# Altium PCB DSD_SDR_MainBoard_Simple.PcbDoc
Units mm, origin at the board's own origin, x right, y up, seen from the top; angles counter-clockwise.
Board outline 80.64 x 31.5 mm, 2 copper layers (Top Layer, Bottom Layer), stack 1.569 mm thick; 10 components, 13 nets, 66 pads, 11 vias.
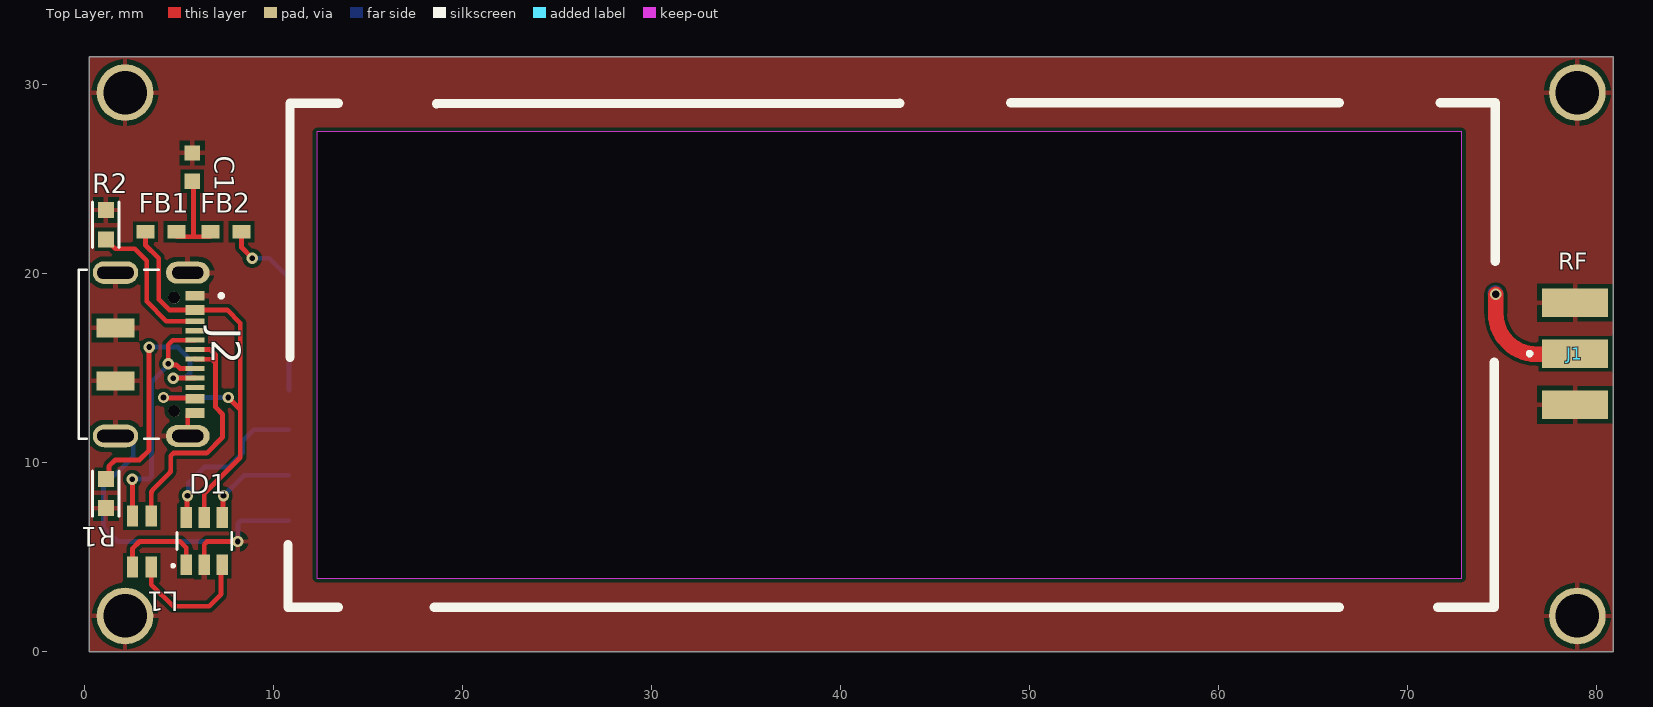
[diagram p0: Top Layer view]
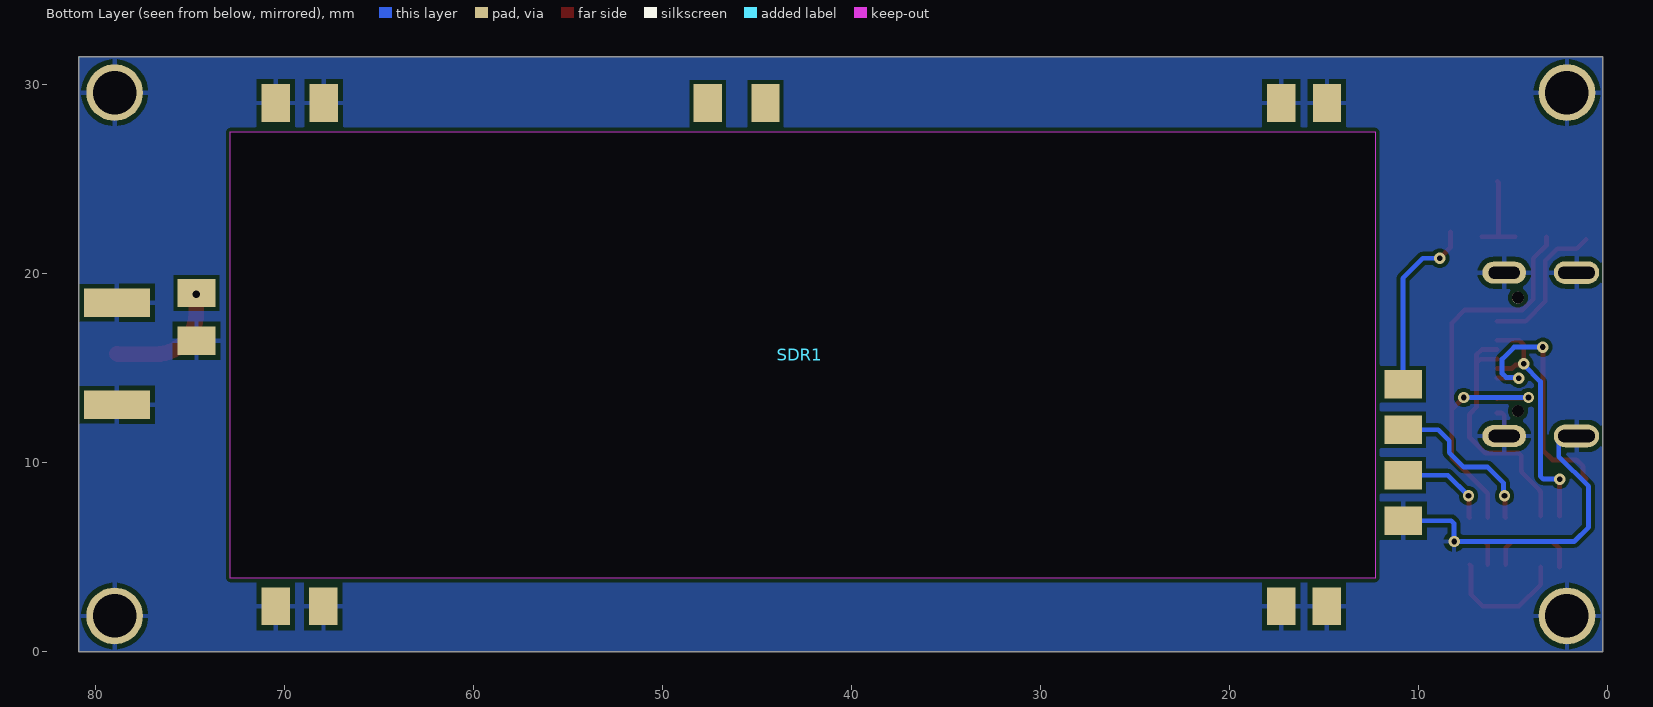
[diagram p1: Bottom Layer view, seen from below]
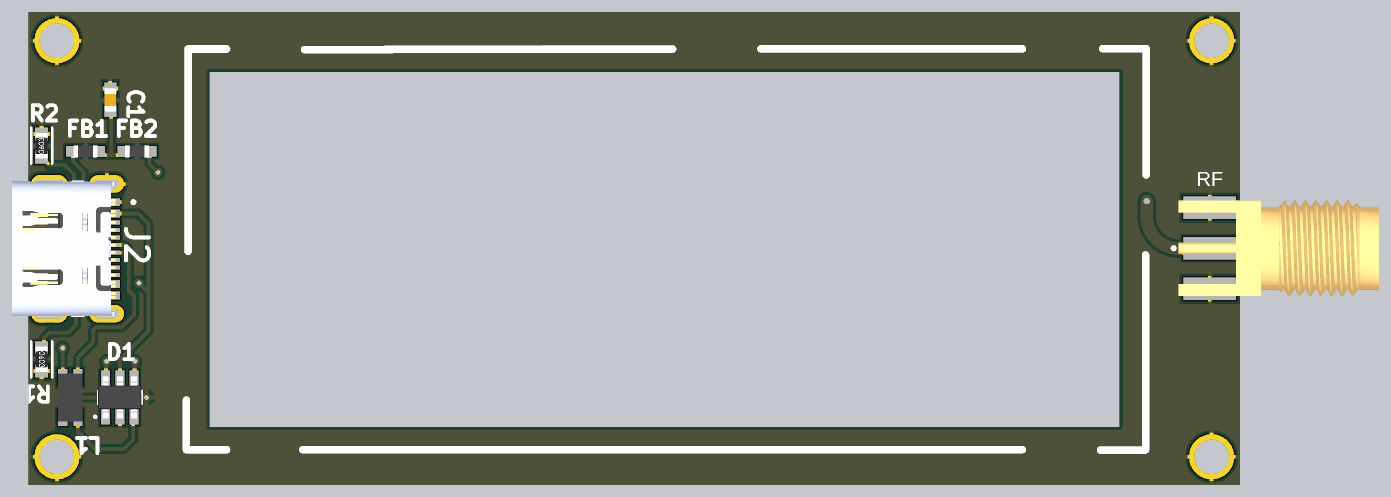
[diagram p2: 3D render of the assembled board from above, using the file's embedded part models]

## Layer stack, top to bottom
Top Solder: solder mask 0.0254, SM-001, Dk 4
Top Layer: signal copper 0.035
Dielectric 1: core 1.4986, Core-043, Dk 4.5
Bottom Layer: signal copper 0.035
Bottom Solder: solder mask 0.0254, SM-001, Dk 4

## Board outline
0.254,0 0.254,31.496 80.899,31.496 80.899,0

## Design rules (kind name [scope] priority, off if disabled: settings)
Clearance [All] p1: gap=0.2 ignorepadtopadclearanceinfootprint=FALSE except(0: Arc-Hole Track-Hole SMDPad-Hole THPad-Hole Via-Hole Fill-Hole Poly-Hole Region-Hole Text-Hole)
HoleToHoleClearance [All] p1: gap=0 allowstackedmicrovias=TRUE
MinimumSolderMaskSliver [All] p1: minsoldermaskwidth=0
PolygonConnect [All] p1: connectstyle=Relief reliefconductorwidth=0.254 reliefentries=4 polygonreliefangle="90 Angle" airgapwidth=0.254
RoutingVias [All] p1: holewidth=0.3 width=0.6 viastyle="Through Hole" minholewidth=0.3 minwidth=0.6 maxholewidth=0.711 maxwidth=1.27
SilkToSilkClearance [All] p1: silktosilkclearance=0
SilkToSolderMaskClearance [IsPad] p1: minsilkscreentomaskgap=0 clearancetoexposedcopper=TRUE
SolderMaskExpansion [All] p1: expansion=0.102 istentingtop=FALSE
Width RF [InNet('RF')] p1: maxlimit=0.826 minlimit=0.826 preferedwidth=0.826 impedanceprofiledriven=TRUE impedanceprofileid={A931AD90-E5BE-4048-AE62-1A7E0EDC505E} impedanceprofilevalue=50.000000 minimp=50.000000 maximp=50.000000 favimp=50.000000
Width [All] p2: maxlimit=0.254 minlimit=0.254 preferedwidth=0.254
26 further rules are at their usual default settings.

## Components (designator, comment, footprint, x,y, rotation, side; value= is the part's Value field where it differs from the comment)
C1 "680nF" WCAP-CSGP_0603_L1.6W0.8H0.8_Reflow 5.715,25.654 r270 top
D1 "5V" WE-TVS_SOT23-6L 6.35,5.862 r0 top
FB1 "600Ohm" WE-CBF_0603_L1.6W0.8H0.8_HC 4.064,22.225 r0 top
FB2 "600Ohm" WE-CBF_0603_L1.6W0.8H0.8_HC 7.493,22.225 r0 top
J1 "CON-SMA-EDGE-S" RFSOLUTIONS_CON-SMA-EDGE-S 78.867,15.781 r180 top
J2 "DX07S016JA1R1500" JAE_DX07S016JA1R1500 4.751,15.745 r270 top
L1 "90Ohm" WE-CNSW_1206 3.048,5.842 r270 top
R1 "5.1k" SMD-0603-RES 1.143,8.382 r180 top
R2 "5.1k" SMD-0603-RES 1.143,22.606 r0 top
SDR1 "SDR_Module" SDR 11.922,6.059 r90 top

## Footprints (in the part's own frame and the unit in brackets; to place one, negate y for a bottom-side part, rotate by r counter-clockwise, add the part's x,y. Pads: shape width x height; smd on the part's side, far side on the other; paste and mask are expansions set on the pad)
JAE_DX07S016JA1R1500 [mm]
  rect 0.52x1 smd: 1(-3.1,1.1) 2(-2.35,1.1) 11(2.35,1.1) 12(3.1,1.1)
  rect 0.27x1 smd: 3(-1.75,1.1) 4(-1.25,1.1) 5(-0.75,1.1) 6(-0.25,1.1) 7(0.25,1.1) 8(0.75,1.1) 9(1.25,1.1) 10(1.75,1.1)
  rect 1x2 smd: S1(-1.4,-3.1) S2(1.4,-3.1)
  oval 1.158x2.316 hole 0.65 slot 1.65 at 90 deg: S3(-4.32,0.725) S4(4.32,0.725)
  oval 1.2x2.4 hole 0.65 slot 1.95 at 90 deg: S5(-4.32,-3.1) S6(4.32,-3.1)
  round 0.63 hole 0.63 unplated: ""(-3,0) ""(3,0)
  round 0.6 hole 0.6 unplated: ""(3,0)
  silkscreen extent -4.47,-5.05 4.47,2.6, body extent -4.46,-5.58 4.48,1.32, height 3.31
RFSOLUTIONS_CON-SMA-EDGE-S [mm]
  rect 3.5x1.5 smd: 1(0,0) G1(0,2.7) G2(0,-2.7)
  rect 3.5x1.5 smd far side: G3(0,2.7) G4(0,-2.7)
  silkscreen extent 2.3,-0.1 2.5,0.1, body extent -11.27,-3.18 2.06,3.18, height 3.55
SDR [mm]
  rect 1.5x2 smd far side: 1(8.109,1.106) 2(3.289,1.106) 3(5.699,1.106) 4(0.879,1.106) 4(10.402,-62.737) 7(12.932,-62.737)
  rect 2x1.5 smd far side: 4(-3.646,-5.35) 4(-3.646,-2.94) 4(-3.646,-58.547) 4(-3.646,-56.026) 4(22.987,-5.344) 4(22.987,-2.934) 4(22.987,-58.547) 4(22.987,-56.007) 5(22.987,-32.639) 6(22.987,-35.687)
  Keep-Out Layer board cut-out: 21.463,-60.96 21.463,-0.381 -2.159,-0.381 -2.159,-60.96
  silkscreen extent -3.7,-62.72 23,1.14
SMD-0603-RES [mm]
  rect 0.85x0.85 smd: 1(0,0.775) 2(0,-0.775)
  silkscreen extent -0.7,-1.2 0.7,1.2, body extent -0.4,-0.85 0.4,0.85, height 0.56
WCAP-CSGP_0603_L1.6W0.8H0.8_Reflow [mm] "Ceramic Capacitors, body 1.6x0.8mm"
  rect 0.8x0.8 smd: 1(-0.75,0) 2(0.75,0)
  body extent -0.8,-0.4 0.8,0.4, height 0.8
WE-CBF_0603_L1.6W0.8H0.8_HC [mm] "SMD EMI Suppression Ferrite  Bead, body 1.60x0.80mm"
  rect 0.95x0.7 smd: 1(-0.825,0) 2(0.825,0)
  body extent -0.8,-0.4 0.8,0.4, height 0.8
WE-CNSW_1206 [mm] "SMT Common Mode Line Filter, 4-leads, body 3.20x1.60mm"
  rect 1.1x0.6 smd: 1(-1.35,0.5) 2(1.35,0.5) 3(1.35,-0.5) 4(-1.35,-0.5)
  body extent -1.6,-0.8 1.6,0.8, height 1.8
WE-TVS_SOT23-6L [mm] "TVS Diode, package SOT23-6L"
  rect 0.6x1.1 smd: 1(-0.95,-1.25) 2(0,-1.25) 3(0.95,-1.25) 4(0.95,1.25) 5(0,1.25) 6(-0.95,1.25)
  silkscreen extent -1.72,-1.37 1.45,0.45, body extent -1.45,-1.4 1.45,1.4, height 1.16

## Part data
C1: library part 885012206051, "WCAP-CSGP Multilayer Ceramic Chip Capacitor, General Purpose, size 0603, X7R, 680nF, 16VDC", Capacitance Tolerance=+/-10%, Case/Size Code=0603, Insulation Resistance=0.7GΩ, Manufacturer="Wurth Elektronik", Operating Temperature Max=125°C, Operating Temperature Min=-55°C, Rated Voltage (DC)=16V, Capacitance=680nF, Category="Multilayer Ceramic Chip Capacitors", Ceramic Type=X7R, ComponentLink1Description="Website Link", ComponentLink1URL=https://www.we-online.com/redexpert/article/885012206051?ad, ComponentLink2Description="Datasheet Link", ComponentLink2URL=https://www.we-online.com/redexpert/spec/885012206051?ad, Dissipation Factor=10%, Height=0.8mm, Length=1.6mm, Manufacturer Part Number=885012206051, Match Code=WCAP-CSGP, Mount="Surface Mount", Packaging="Tape and Reel", Technical Reference=X7R0603684K016DFCT10000, Width=0.8mm
D1: library part 82400102, "WE-TVS TVS Diode – High Speed Series, SOT23-6L, 2+1 Channel, 5V, 2pF", (Reverse) Breakdown Voltage=6V, (Reverse) Peak Pulse Current=7A, Case/Size Code=SOT23-6L, Channel ESD Clamping Voltage=10V, Channel Input Capacitance=2pF, Channel Reverse Leakage Current=1µA, Manufacturer="Wurth Elektronik", Operating Temperature Max=125°C, Operating Temperature Min=-40°C, Category="ESD Protection", Channel Operating Voltage=5V, ComponentLink1Description="Website Link", ComponentLink1URL=https://www.we-online.com/redexpert/article/82400102?ad, ComponentLink2Description="Datasheet Link", ComponentLink2URL=https://www.we-online.com/redexpert/spec/82400102?ad, ESD Air Discharge Capability=15kV, ESD Contact Discharge Capability=8kV, Height=1.45mm, Length=2.9mm, Manufacturer Part Number=82400102, Match Code=WE-TVS, Mount="Surface Mount", Number of Channels=2+1, Packaging="Tape and Reel", Polarity=Unidirectional, Width=2.8mm
FB1 FB2: library part 742792651, "WE-CBF SMT EMI Suppression Ferrite Bead, size 0603, 600Ohm, 1A", Case/Size Code=0603, DC Resistance Max=0.2Ohm, Manufacturer="Wurth Elektronik", Operating Temperature Max=125°C, Operating Temperature Min=-55°C, Rated Current=1A, Category="Ferrites for PCB Assembly", ComponentLink1Description="Website Link", ComponentLink1URL=https://www.we-online.com/redexpert/article/742792651?ad, ComponentLink2Description="Datasheet Link", ComponentLink2URL=https://www.we-online.com/redexpert/spec/742792651?ad, Height=0.8mm, Impedance @100MHz=600Ohm, Impedance Max=800Ohm, Impedance Max Test Condition=200MHz, Length=1.6mm, Manufacturer Part Number=742792651, Match Code=WE-CBF, Mount="Surface Mount", Packaging="Tape and Reel", Type="High Current", Width=0.8mm
J1: "SMA Connector Jack, Female Socket - Board Edge, End Launch Solder", Package=None, Check_prices=https://www.snapeda.com/parts/CON-SMA-EDGE-S/RF+Solutions/view-part/?ref=eda, Digi-Key_Part_Number=CON-SMA-EDGE-S-ND, MF="RF Solutions", MP=CON-SMA-EDGE-S, Purchase-URL=https://pricing.snapeda.com/search/part/CON-SMA-EDGE-S/?ref=eda, SnapEDA_Link=https://www.snapeda.com/parts/CON-SMA-EDGE-S/RF+Solutions/view-part/?ref=snap
J2: "USB-C (USB TYPE-C) USB 2.0 Receptacle Connector 24 (16+8 Dummy) Position Surface Mount, Right Angle; Through Hole", Package=None, Availability=Unavailable, DigiKey-Purchase-URL=https://snapeda.com/shop?store=DigiKey&id=4551013, MF="JAE Electronics", MP=DX07S016JA1R1500, Price=None, SnapEDA_Link=https://www.snapeda.com/parts/DX07S016JA1R1500/JAE%20Electronics/view-part/4551013/?ref=snap
L1: library part 744232090, "WE-CNSW SMT Common Mode Line Filter, size 1206, 90Ohm, 0.111uH, 50V", Case/Size Code=1206, DC Resistance Max=0.3Ohm, Inductance=0.111uH, Insulation Test Voltage=125VAC, Manufacturer="Wurth Elektronik", Operating Temperature Max=125°C, Operating Temperature Min=-40°C, Rated Current=0.37A, Rated Voltage=50V, Category="Common Mode Chokes", ComponentLink1Description="Manufacturer Link", ComponentLink1URL=https://www.we-online.com/redexpert/article/744232090?ad, ComponentLink2Description=Datasheet, ComponentLink2URL=https://www.we-online.com/redexpert/spec/744232090?ad, Height=1.8mm, Impedance @100MHz=90Ohm, Length=3.2mm, Manufacturer Part Number=744232090, Match Code=WE-CNSW, Mount="Surface Mount", Packaging="Tape and Reel", Width=1.6mm, Winding Style=bifiliar
R1 R2: library part ERJ-3EKF5101V, "RES SMD 5.1K OHM 1% 1/10W 0603", Digi-Key Part Number=P5.10KHCT-ND, Manufacturer="Panasonic Electronic Components", Operating Temperature="-55°C ~ 155°C", Package / Case="0603 (1608 Metric)", Power (Watts)="0.1W, 1/10W", Supplier Device Package=0603, Temperature Coefficient=±100ppm/°C, Tolerance=±1%, @ qty=1500, Composition="Thick Film", Datasheets=http://industrial.panasonic.com/www-cgi/jvcr13pz.cgi?E+PZ+3+AOA0002+ERJ3EKF5101V+7+WW, Factory Stock=0, Failure Rate=-, Features="Automotive AEC-Q200", Height - Seated (Max)="0.022\" (0.55mm)", Image=//media.digikey.com/Photos/Panasonic%20Photos/MFG_ERJ-P6W%20Series.jpg, Minimum Quantity=1, Number of Terminations=2, Packaging="Cut Tape (CT)", Part Number=ERJ-3EKF5101V, Part Status=Active, Quantity Available=159646, Series=ERJ, Size / Dimension="0.063\" L x 0.031\" W (1.60mm x 0.80mm)", Unit Price (USD)=0.00379

## Free pads (board coordinates)
  round 3 hole 2.3: 2(2.159,1.905) 2(2.159,29.591) 2(78.994,1.905) 2(78.994,29.591)

## Via types
v1: diameter 0.6, hole 0.3, Top Layer to Bottom Layer, tented both sides, 10 vias
v2: diameter 0.6, hole 0.4, Top Layer to Bottom Layer, tented both sides, 1 vias

## Nets (pads, with @x,y where several pads share a name; then routed paths per layer and width w, separated by ;. In a path a pad name is that pad's centre, name@x,y a point inside that pad or via, vN(x,y) a via of type N, cw(c..) or ccw(c..) an arc to the next point about the centre after c; other vN are vias at no path point)
+5-USB: D1.5 FB1.1 J2.2 J2.11 | length 25.5
  Top Layer w0.254: FB1.1@3.239,21.971 3.239,21.526 3.937,20.828 3.937,18.651 4.493,18.095 J2.2 7.559,18.095 8.255,17.399 8.255,12.827 ; v1(4.191,13.462) 4.225,13.428 5.817,13.428 J2.11 ; D1.5 6.35,8.382 8.255,10.287 8.255,12.827 ; v1(7.62,13.462) 8.255,12.827
  Bottom Layer w0.254: v1(4.191,13.462) v1(7.62,13.462)
+5_SDR: FB2.2 SDR1.1 | length 9.9
  Top Layer w0.254: FB2.2 8.318,21.4 v1(8.89,20.828)
  Bottom Layer w0.254: v1(8.89,20.828) 9.779,20.828 10.833,19.774 SDR1.1@10.833,13.845
D+_P: D1.3 L1.2 | length 6.9
  Top Layer w0.254: L1.2 3.548,3.564 4.699,2.413 6.604,2.413 7.239,3.048 7.239,4.551 D1.3
D-_N: D1.1 L1.3 | length 5
  Top Layer w0.254: L1.3 2.548,5.469 2.921,5.842 5.08,5.842 5.4,5.522 D1.1
GND: C1.1 D1.2 J1.G1 J1.G2 J1.G3 J1.G4 J2.1 J2.12 J2.S1 J2.S2 J2.S3 J2.S4 J2.S5 J2.S6 pad.2 R1.1 R2.1 SDR1.4 | length 20.8
  Top Layer w0.254: J2.S4 5.478,11.427 5.478,12.512 5.611,12.645 J2.12 ; D1.2 6.35,5.693 6.499,5.842 v1(8.128,5.842)
  Bottom Layer w0.254: J2.S6@2.658,11.17 2.591,11.103 2.591,10.338 1.016,8.763 1.016,6.604 1.778,5.842 v1(8.128,5.842) 8.128,6.788 8.277,6.937 SDR1.4@10.816,6.937
NetC1_2: C1.2 FB1.2 FB2.1 | length 4.7
  Top Layer w0.254: FB1.2@4.889,21.971 5.779,21.971 ; C1.2@5.842,24.904 5.779,24.841 5.779,21.971 ; FB2.1@6.668,21.971 5.779,21.971
NetJ2_3: J2.3 R2.2 | length 7.8
  Top Layer w0.254: R2.2 1.638,21.336 2.667,21.336 3.302,20.701 3.302,18.542 4.349,17.495 J2.3
NetJ2_5: J2.5 J2.8 L1.4 | length 13.4
  Top Layer w0.254: v1(2.54,9.144) 2.544,9.14 2.544,7.196 L1.4 ; J2.8 5.069,14.995 4.89,15.174 4.511,15.174 v1(4.445,15.24) 4.445,16.256 4.684,16.495 J2.5
  Bottom Layer w0.254: v1(2.54,9.144) 3.415,9.144 3.564,9.293 3.564,14.304 4.445,15.185 v1(4.445,15.24)
NetJ2_6: J2.6 J2.7 L1.1 | length 13.6
  Top Layer w0.254: L1.1 3.548,8.397 cw(c3.802,8.396) 3.621,8.574 4.498,9.451 ccw(c4.318,9.63) 4.572,9.63 4.572,10.37 4.721,10.519 6.474,10.519 7.312,11.357 7.312,12.578 6.944,12.946 6.944,15.281 ; J2.7 5.859,15.487 6.738,15.487 6.944,15.281 ; J2.6 6.666,15.995 6.944,15.717 6.944,15.281
NetJ2_9: J2.9 R1.2 | length 14
  Top Layer w0.254: R1.2 1.305,9.319 1.305,9.814 1.651,10.16 2.921,10.16 3.429,10.668 v1(3.429,16.129) ; v1@4.716,14.495 J2.9
  Bottom Layer w0.254: v1(3.429,16.129) 4.953,16.129 5.588,15.494 5.588,14.732 5.38,14.524 4.745,14.524 v1(4.699,14.478)
RF: J1.1 SDR1.7 | length 6.5
  Top Layer w0.826: v2(74.676,18.923) 74.676,17.907 ccw(c76.835,17.907) 76.835,15.748 78.834,15.748 J1.1
  Bottom Layer w0.826: SDR1.7 74.676,18.974 v2(74.676,18.923)
SDR_D+_P: D1.4 SDR1.2 | length 5.1
  Top Layer w0.254: D1.4 7.333,7.145 7.333,8.222 v1(7.366,8.255)
  Bottom Layer w0.254: v1(7.366,8.255) 8.458,9.347 SDR1.2
SDR_D-_N: D1.6 SDR1.3 | length 8.7
  Top Layer w0.254: D1.6 5.43,7.143 5.43,8.224 v1(5.461,8.255)
  Bottom Layer w0.254: v1(5.461,8.255) 5.507,8.301 5.507,8.936 6.35,9.779 7.62,9.779 8.382,10.541 8.382,11.176 8.963,11.757 SDR1.3
pads on no net: J2. J2.4 J2.10 SDR1.5 SDR1.6

## Polygon pours and split planes (outlines as drawn)
GND on Bottom Layer "GND_L02_P001" (solid, pour order 1): 0.254,31.496 80.899,31.496 80.899,0 0.254,0
GND on Top Layer "GND_L01_P000" (solid, pour order 0): 0.254,31.496 80.899,31.496 80.899,0 0.254,0

## Silkscreen, mask and mechanical layers (free items; w line width, h text height)
Top Overlay:
  text "RF" at 77.978,19.939 h1.52
Mechanical 1:
  the board outline again, w0.254